# Altium PCB TPS54627DDAR-PCB.PcbDoc
Units mil, origin at the board's own origin, x right, y up, seen from the top; angles counter-clockwise.
Board outline not stored, 2 copper layers (Top Layer, Bottom Layer); 13 components, 0 nets, 33 pads, 6 vias.
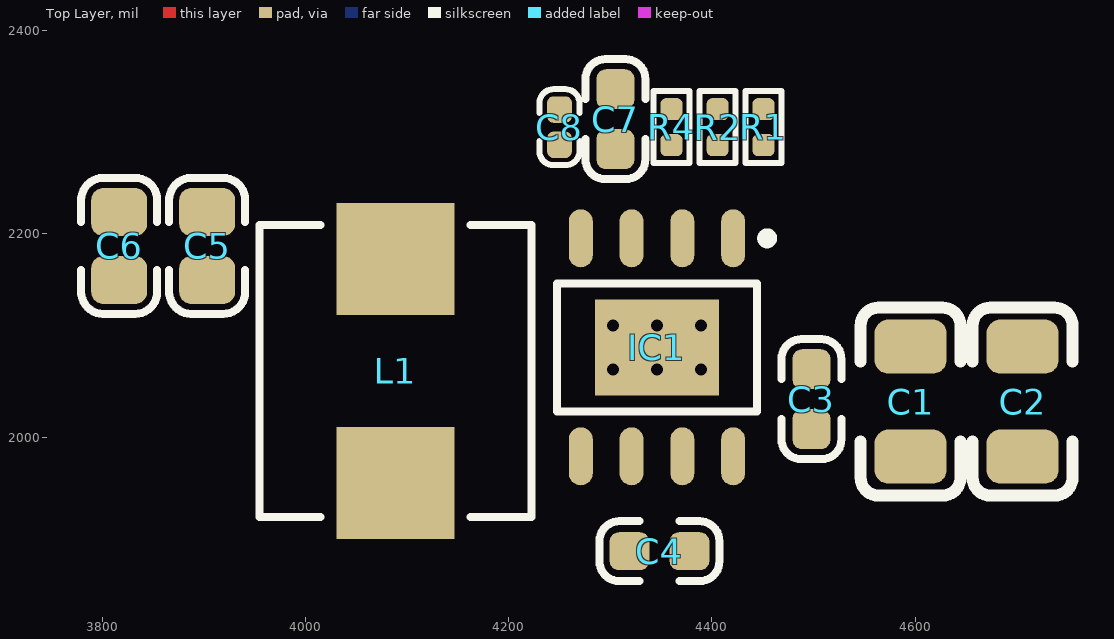
[diagram p0: Top Layer view]
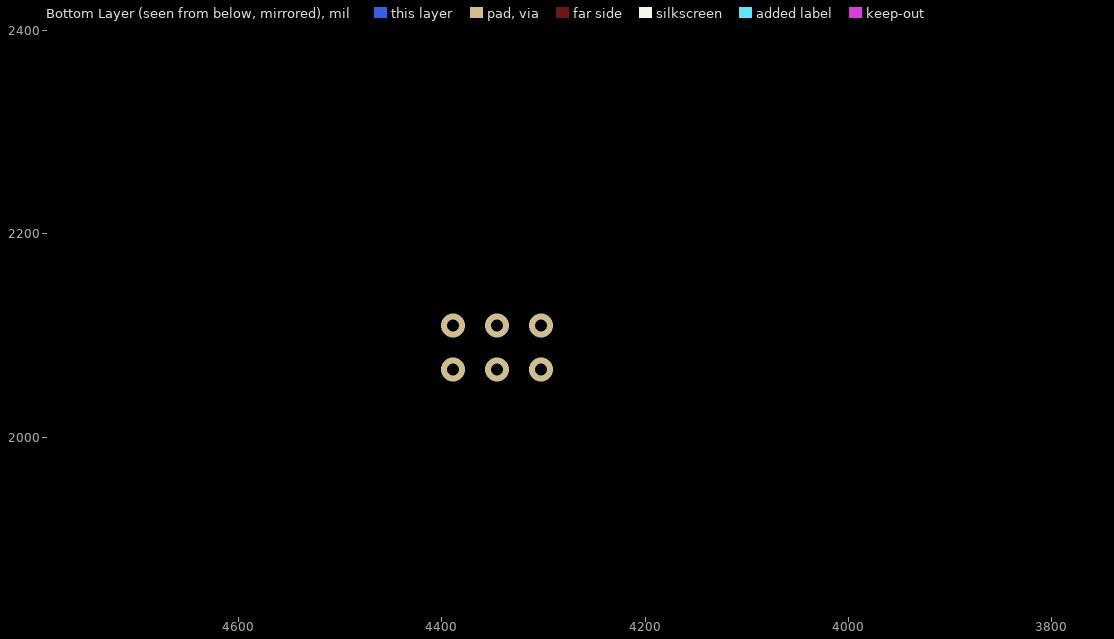
[diagram p1: Bottom Layer view, seen from below]

## Layer stack, top to bottom
Top Solder: solder mask 0.4, Solder Resist, Dk 3.5
Top Layer: signal copper 1.4
Dielectric 1: dielectric 12.6, FR-4, Dk 4.8
Bottom Layer: signal copper 1.4
Bottom Solder: solder mask 0.4, Solder Resist, Dk 3.5

## Components (designator, comment, footprint, x,y, rotation, side; value= is the part's Value field where it differs from the comment)
C1 "10uF" C_1206 4595.55,2035.04 r270 top
C2 "10uF" C_1206 4705.79,2035.04 r270 top
C3 "100nF" C_0603 4498.03,2037.4 r270 top
C4 "100nF/50V" C_0603 4348.43,1887.8 r0 top
C5 "22uF" C_0805 3903.27,2188.23 r270 top
C6 "22uF" C_0805 3816.65,2188.23 r270 top
C7 "1uF 50V" C_0603 4305.12,2312.99 r90 top
C8 "8.2nF" C_0402 4250,2305.12 r270 top
IC1 "TPS54627DDAR" SOIC-8-PowerPAD 4345.94,2088.46 r270 top
L1 "3.3uH 6.5A" Ind-SMD_7.3x6.6 4088.58,2064.96 r90 top
R1 "10kΩ" R_0402 4450.79,2305.12 r90 top
R2 "124kΩ" R_0402 4405.63,2305.12 r270 top
R4 "22kΩ" R_0402 4360.24,2305.12 r270 top

## Footprints (in the part's own frame and the unit in brackets; to place one, negate y for a bottom-side part, rotate by r counter-clockwise, add the part's x,y. Pads: shape width x height; smd on the part's side, far side on the other; paste and mask are expansions set on the pad)
C_0402 [mm] "Chip Capacitor, 2-Leads, Body 1.00x0.50mm, IPC Medium Density"
  rrect50% 0.66x0.62 smd: 1(-0.44,0) 2(0.44,0)
  silkscreen extent -0.95,-0.5 0.95,0.5, body extent -0.52,-0.27 0.53,0.28, height 0.55
C_0603 [mm] "Chip Capacitor, 2-Leads, Body 1.60x0.80mm, IPC Medium Density"
  rrect50% 1x0.95 smd: 1(-0.75,0) 2(0.75,0)
  silkscreen extent -1.5,-0.75 1.5,0.75, body extent -0.8,-0.4 0.8,0.4, height 0.87
C_0805 [mm] "Chip Capacitor, 2-Leads, Body 2.00x1.25mm, IPC Medium Density"
  rrect50% 1.2x1.4 smd: 1(-0.85,0) 2(0.85,0)
  silkscreen extent -1.7,-0.95 1.7,0.95, body extent -1,-0.62 1,0.63, height 0.88
C_1206 [mm] "Chip Capacitor, 2-Leads, Body 3.20x1.60mm, IPC Medium Density"
  rrect50% 1.35x1.8 smd: 1(-1.375,0) 2(1.375,0)
  silkscreen extent -2.35,-1.25 2.35,1.25, body extent -1.6,-0.8 1.6,0.8, height 1.8
Ind-SMD_7.3x6.6 [mm] "Molded Inductor, 2-Leads, Body 7.30x6.60mm, IPC Medium Density"
  rect 2.8x2.95 smd: 1(-2.8,0) 2(2.8,0)
  silkscreen extent -3.65,-3.4 3.65,3.4, body extent -3.45,-3.3 3.45,3.3, height 2.81
R_0402 [mm] "Chip Resistor, 2-Leads, Body 1.00x0.50mm, IPC Medium Density"
  rrect50% 0.55x0.55 smd: 1(-0.45,0) 2(0.45,0)
  silkscreen extent -0.9,-0.45 0.9,0.45, body extent -0.5,-0.27 0.5,0.28, height 0.4
SOIC-8-PowerPAD [mm] "SOIC, 8-Leads, Body 4.90x3.90mm, Pitch 1.27mm, Thermal Pad 3.10x2.40mm, IPC Medium Density"
  oval 1.45x0.6 smd: 1(-2.725,1.905) 2(-2.725,0.635) 3(-2.725,-0.635) 4(-2.725,-1.905) 5(2.725,-1.905) 6(2.725,-0.635) 7(2.725,0.635) 8(2.725,1.905)
  rect 2.4x3.1 smd: 9(0,0)
  silkscreen extent -2.85,-2.5 1.6,2.88, body extent -3,-2.45 3,2.45, height 1.7

## Part data
C1 C2 C3 C4 C5 C6 C8: library part Cap_Chip, "贴片电容"
C7: library part Cap_MLCC, "贴片电容"
IC1: "DC-DC 降压芯片", Manufacturer_Name="Texas Instruments", Mouser Part Number=595-TPS54627DDAR, Arrow Part Number=TPS54627DDAR, Arrow Price/Stock=https://www.arrow.com/en/products/tps54627ddar/texas-instruments, Datasheet Link=http://www.ti.com/lit/gpn/tps54627, Height=1.7mm, Manufacturer_Part_Number=TPS54627DDAR, Mouser Price/Stock=https://www.mouser.com/Search/Refine.aspx?Keyword=595-TPS54627DDAR
L1: library part INDUCTOR, "MHCI06030-3R3M-R8A", LCSC=C280586, ComponentLink1Description=LCSC, ComponentLink1URL=https://item.szlcsc.com/267006.html
R1 R2 R4: library part Res_Chip, "贴片电阻"

## Via types
v1: diameter 23.62, hole 11.81, Top Layer to Bottom Layer, tented both sides, 6 vias

## Nets (pads, with @x,y where several pads share a name; then routed paths per layer and width w, separated by ;. In a path a pad name is that pad's centre, name@x,y a point inside that pad or via, vN(x,y) a via of type N, cw(c..) or ccw(c..) an arc to the next point about the centre after c; other vN are vias at no path point)
pads on no net: C1.1 C1.2 C2.1 C2.2 C3.1 C3.2 C4.1 C4.2 C5.1 C5.2 C6.1 C6.2 C7.1 C7.2 C8.1 C8.2 IC1.1 IC1.2 IC1.3 IC1.4 IC1.5 IC1.6 IC1.7 IC1.8 IC1.9 L1.1 L1.2 R1.1 R1.2 R2.1 R2.2 R4.1 R4.2
copper on no net:
  other v1: 4302.64,2066.81 4345.94,2066.81 4389.25,2066.81 4302.64,2110.12 4345.94,2110.12 4389.25,2110.12